# Altium PCB TIDA_010057.PcbDoc (part 2 of 9)
Units mil, origin at the board's own origin, x right, y up, seen from the top; angles counter-clockwise.
Board outline 1771.65 x 3543.31 mil, 12 copper layers (Top Layer, GND1, Signal Layer 1, GND2, POWER1, POWER2, GND4, POWER3, GND6, Signal Layer 2, GND7, Bottom Layer), stack 62.79 mil thick; 593 components, 374 nets, 1805 pads, 1029 vias.
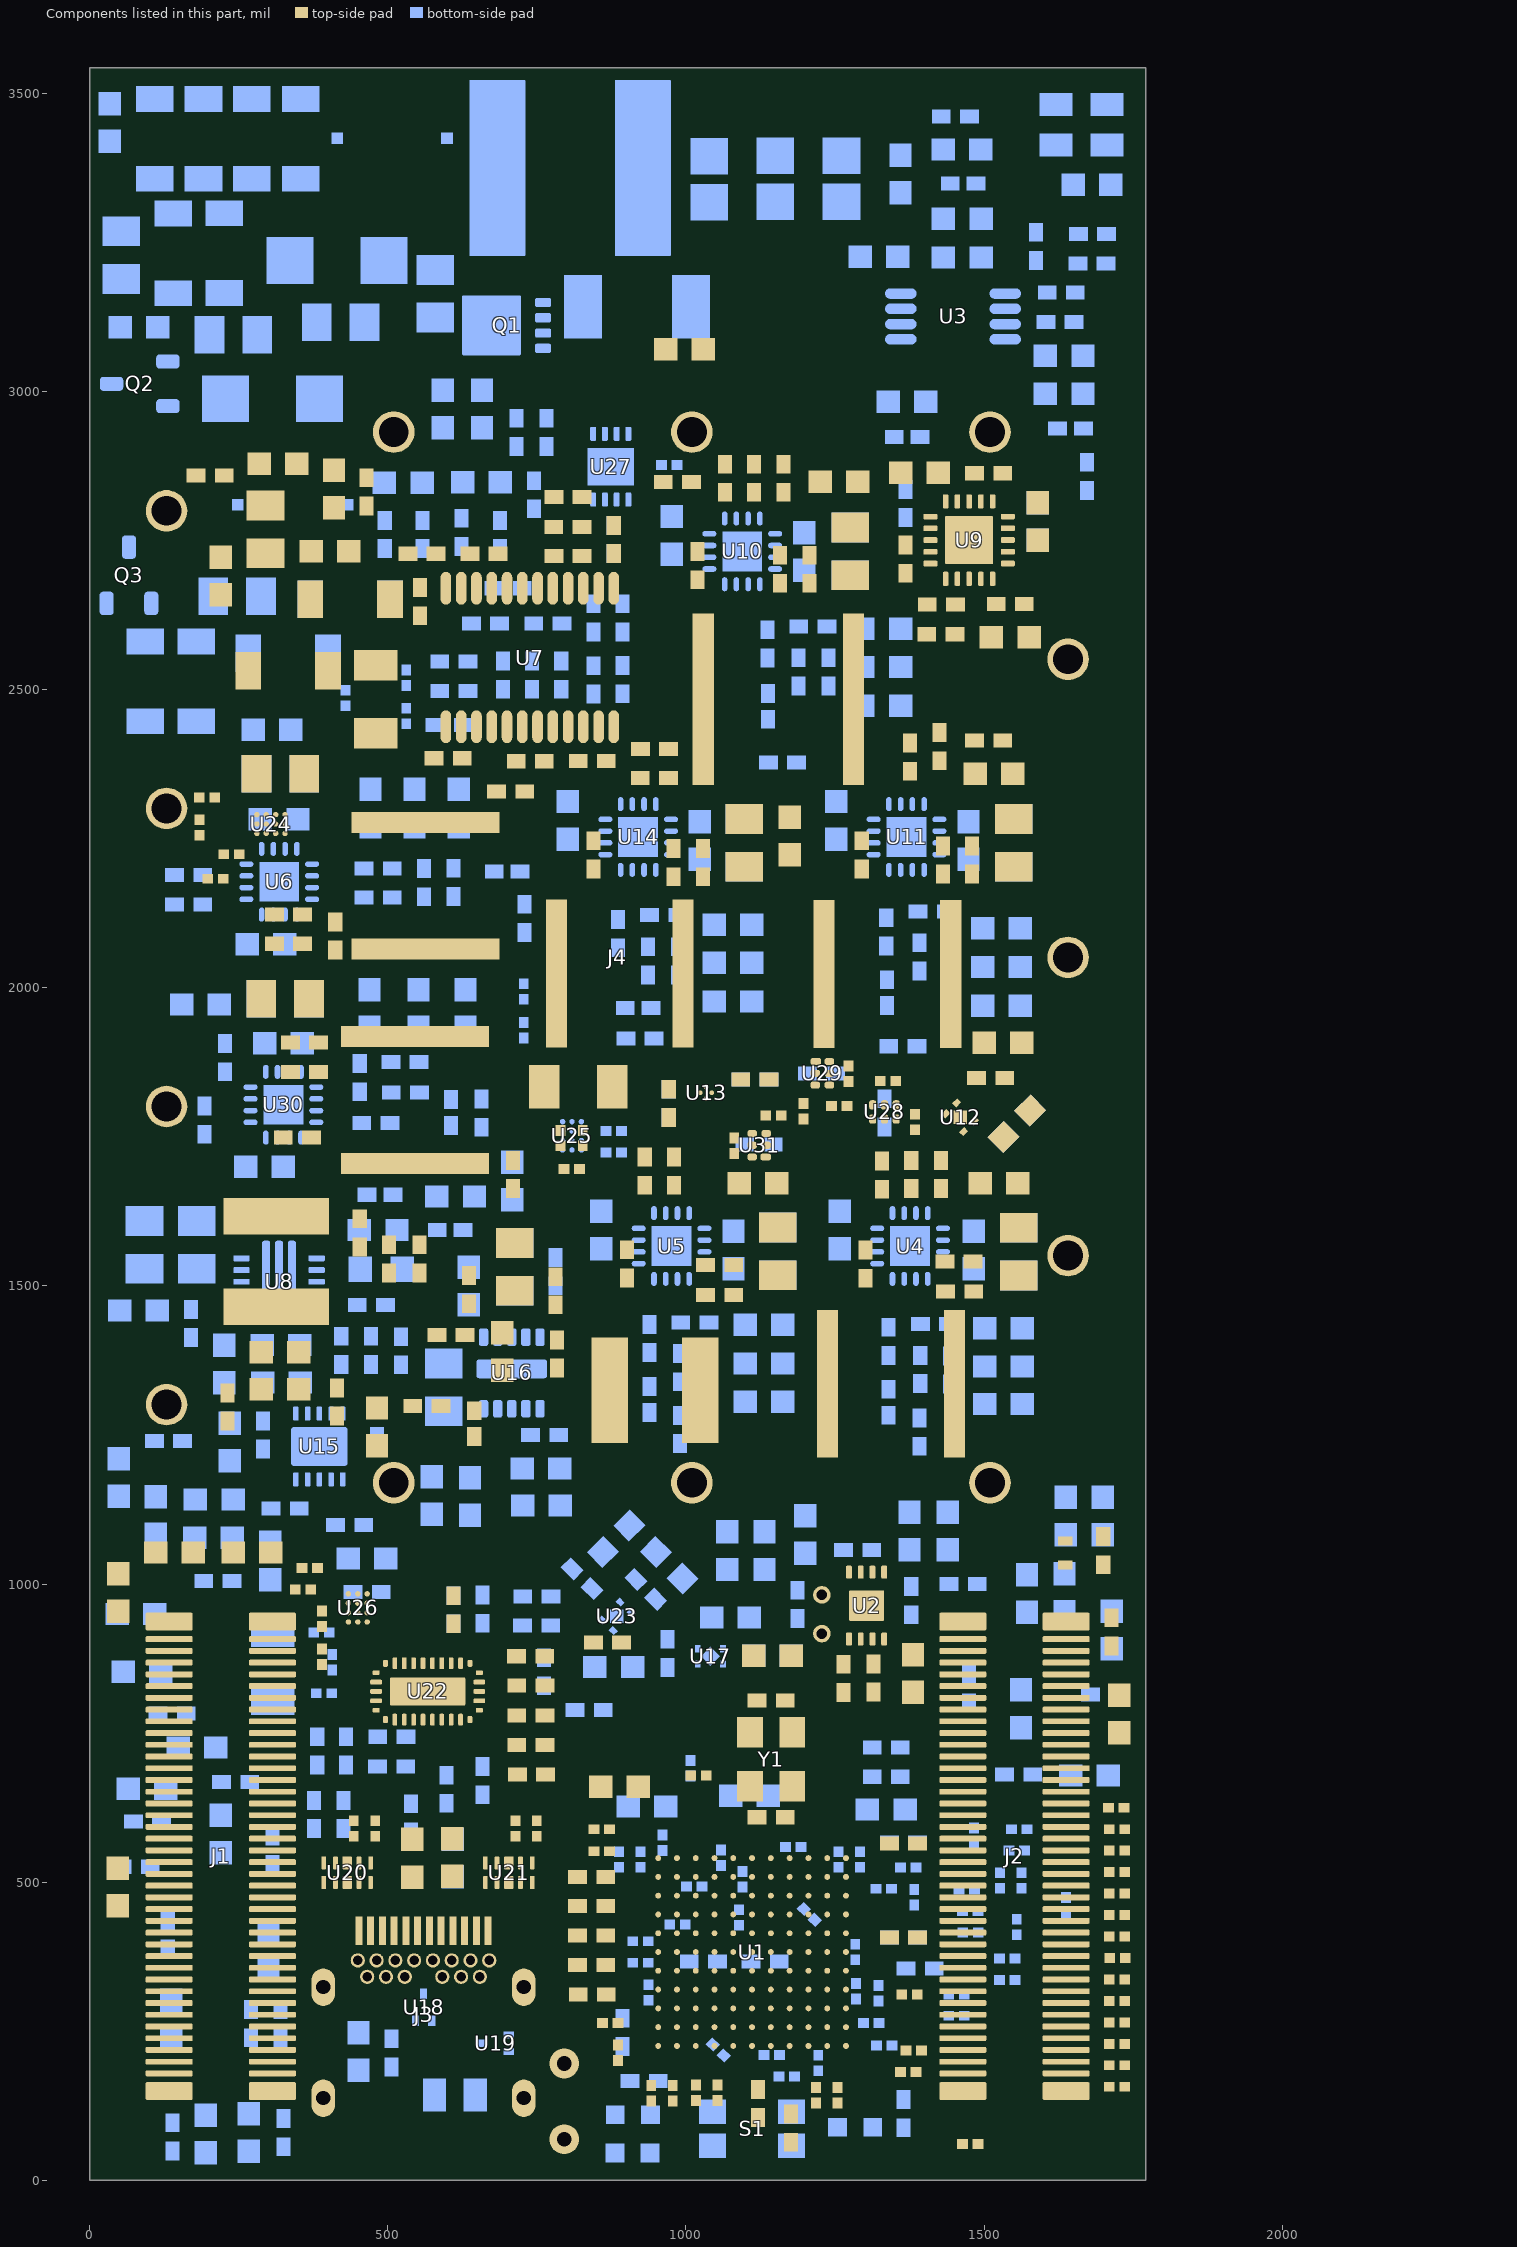
[diagram p12: the components of this part, seen from the top]

## Components (designator, comment, footprint, x,y, rotation, side; value= is the part's Value field where it differs from the comment) (continued)
R196 "RC0201JR-0722RL" 0201 1723,301 r0 top value=22
R197 "RC0201JR-0722RL" 0201 1723,337 r0 top value=22
R198 "RC0201JR-0722RL" 0201 1477.42,415.58 r180 bottom value=22
R199 "RC0201JR-0722RL" 0201 1722,625 r0 top value=22
R200 "RT0603BRD0710KL" 0603 83,3108 r0 bottom value=10.0k
R201 "RT0603BRD0710KL" 0603 220,2690.5 r90 top value=10.0k
R216 "RC0201JR-0722RL" 0201 1723,481 r180 top value=22
R217 "RC0201JR-0722RL" 0201 1637.65,461.65 r90 bottom value=22
R218 "RC0201JR-0722RL" 0201 1723,517 r180 top value=22
R219 "RC0201JR-0722RL" 0201 1723,553 r0 top value=22
R220 "RC0201JR-0722RL" 0201 1373,525 r0 bottom value=22
R221 "RC0201JR-0722RL" 0201 1723,589 r0 top value=22
R222 "RC0201JR-0722RL" 0201 1555,553 r180 bottom value=22
R223 "RC0201JR-0722RL" 0201 1527,503 r270 bottom value=22
R224 "RC0201JR-0722RL" 0201 1471,488 r180 bottom value=22
R225 "RC0201JR-0722RL" 0201 1559,589 r0 bottom value=22
R226 "RC0201JR-0722RL" 0201 1563,503 r90 bottom value=22
R227 "RC0201JR-0722RL" 0201 1723,445 r180 top value=22
R228 "RC0201JR-0722RL" 0201 1477,452 r0 bottom value=22
R229 "CRCW02014K70FKED" 0201_033 393,817 r180 bottom value=4.70k
R230 "CRCW02014K70FKED" 0201_033 389,919 r180 bottom value=4.70k
R231 "ERJ-1GN0R00C" 0201 390,942 r270 top value=0
R232 "RC0201FS-7D10KL" 0201 728,1928.99 r90 bottom value=10.0k
R233 "RC0201FS-7D10KL" 0201 728,1994 r90 bottom value=10.0k
R234 "ERJ-1GE0R00C" 0201 1273,1856 r90 top value=0
R235 "ERJ-1GN0R00C" 0201 237.99,2224 r180 top value=0
R236 "RC0201FS-7D10KL" 0201 369.01,1027 r180 top value=10.0k
R237 "RC0201FS-7D10KL" 0201 357.99,991 r180 top value=10.0k
R238 "ERJ-2RKF2003X" 0402 598.31,656 r90 bottom value=200k
R239 "ERA-3AEB2552V" 0603 757.5,1132 r180 bottom value=25.5k
R240 "RC0201JR-0722RL" 0201 1483,578 r90 bottom value=22
R241 "ERJ-3EKF1001V" 0603 636,1500 r270 bottom value=1.00k
R242 "ERJ-2GE0R00X" 0402 565.62,1299 r180 top value=0
R243 "RC0201JR-0722RL" 0201 1555,425 r270 bottom value=22
R244 "RC0201JR-0722RL" 0201 1723,409 r180 top value=22
R245 "ERJ-2GE0R00X" 0402 1452,3461 r180 bottom value=0
R246 "ERJ-2GE0R00X" 0402 132.38,1240 r180 bottom value=0
R247 "ERJ-2GE0R00X" 0402 784,1386 r270 top value=0
S1 "434153017835" SW_434153017835 1110.94,86.54 r0 bottom
SCL "TESTPOINT" TP_H045P075 1228,917 r90 top
SDA "TESTPOINT" TP_H045P075 1228,982 r90 top
U1 "CYUSB3014-BZXC" BZ-121 1111,383 r0 top locked
U2 "AT24C512C-MAHM" 8MA2 1303,964 r270 top
U3 "LM3488MMX/NOPB" DGK0008A_N 1448.01,3126 r180 bottom
U4 "TPS54218RTER" RTE0016F 1376,1567 r180 bottom locked
U5 "TPS54218RTER" RTE0016F 976,1567 r180 bottom
U6 "TPS54218RTER" RTE0016F 318,2178 r270 bottom
U7 "CDCE949PWR" PW0024A_N 738.38,2554 r270 top
U8 "TPS61178RNWR" RNW0013A 317.67,1507 r180 bottom
U9 "TPS74201RGRT" RGR0020A 1475,2751 r180 top
U10 "TPS54218RTER" RTE0016F 1094.5,2732 r180 bottom locked
U11 "TPS54218RTER" RTE0016F 1370,2253 r180 bottom
U12 "LP5907SNX-3.3/NOPB" DQN0004A 1460,1783 r135 top locked
U13 "LP5910-1.2YKAR" YKA0004ACAC 1033.74,1824 r45 top
U14 "TPS54218RTER" RTE0016F 920,2253 r180 bottom
U15 "TPS7A3901DSCR" DSC0010J 385.32,1230.88 r270 bottom locked
U16 "LMZM23601SILR" SIL0010A 708,1354.11 r270 bottom
U17 "LP5907SNX-1.8/NOPB" DQN0004A 1041,879 r180 bottom
U18 "TPD2EUSB30DRTR" DRT0003A 560,290 r90 bottom
U19 "TPD2EUSB30DRTR" DRT0003A 680,230 r180 bottom
U20 "TPD4E05U06DQAR" DQA0010A 432,516 r270 top
U21 "TPD4E05U06DQAR" DQA0010A 703,516 r270 top
U22 "HD3SS3220IRNHR" RNH0030A 567,820 r270 top locked
U23 "LP5907SNX-3.3/NOPB" DQN0004A 884,946 r225 bottom
U24 "INA231AIYFFR" YFF0012AKAD 304.13,2274.75 r90 top
U25 "INA231AIYFFR" YFF0012AKAD 809,1751.87 r180 bottom
U26 "INA231AIYFFR" YFF0012AKAD 449.75,960.13 r0 top
U27 "LMV112SD/NOPB" NGQ0008A 874,2874 r270 bottom
U28 "SN74LVC1G11DRYR" DRY0006A 1333,1791.81 r270 top
U29 "SN74LVC1G11DRYR" DRY0006A 1228.81,1856.69 r0 top
U30 "TPS54218RTER" RTE0016F 325,1804 r270 bottom
U31 "SN74LVC1G11DRYR" DRY0006A 1123,1736 r180 top
VBUS "TESTPOINT" TP_50MIL-25MILHOLE 796,69 r90 top locked
Y1 "ECS-192-18-33-JEM-TR" ECS_ECX-32 1143,706.5 r180 top
ZZ1 "This Assembly Note is for PCB labels only" AssemblyNoteLabel 265,5041 r0 top
ZZ2 "These assemblies are ESD sensitive, ESD precautions shall be observed." AssemblyNote 263,4963.11 r0 top
ZZ3 "These assemblies must be clean and free from flux and all contaminants. Use of no clean flux is not acceptable." AssemblyNote 263,4874.56 r0 top
ZZ4 "These assemblies must comply with workmanship standards IPC-A-610 Class 2, unless otherwise specified." AssemblyNote 263,4786 r0 top

## Footprints (in the part's own frame and the unit in brackets; to place one, negate y for a bottom-side part, rotate by r counter-clockwise, add the part's x,y. Pads: shape width x height; smd on the part's side, far side on the other; paste and mask are expansions set on the pad)
8MA2 [mm] "ATMEL DFN"
  rrect40% 0.55x0.25 smd: 1(-1.425,0.75) 2(-1.425,0.25) 3(-1.425,-0.25) 4(-1.425,-0.75) 5(1.425,-0.75) 6(1.425,-0.25) 7(1.425,0.25) 8(1.425,0.75)
  rrect8% 1.3x1.5 smd paste-1: 9(0,0)
  rrect8% 1.21x1.38 on Top Paste: 9(0,0)
  silkscreen extent -1.55,-1.15 0.75,1.15, body extent -1.55,-1.05 1.55,1.05, height 0.61
0201 [mm] "Data from Kemet datasheet CC101_COM dated 7/28/11"
  rect 0.46x0.42 smd mask+0.048: 1(-0.33,0) 2(0.33,0)
  body extent -0.31,-0.16 0.31,0.16, height 0.26
0201_033 [mm] "SMD, 2-Leads, Height 0.33mm"
  rect 0.46x0.42 smd mask+0.048: 1(-0.33,0) 2(0.33,0)
  body extent -0.31,-0.16 0.31,0.16, height 0.33
0402 [mm] "0402 from SM-752 data"
  rect 0.8x0.6 smd: 1(-0.6,0) 2(0.6,0)
  silkscreen extent -1.22,-0.52 1.22,0.52, body extent -0.55,-0.3 0.55,0.3, height 0.6
0402_065 [mm] "0402"
  rect 0.8x0.6 smd: 1(-0.6,0) 2(0.6,0)
  silkscreen extent -1.22,-0.52 1.22,0.52, body extent -0.55,-0.3 0.55,0.3, height 0.65
0402_070 [mil] "SMD, 2-Leads, Body 1.2x0.7mm, Height 0.7mm"
  rect 15x24 smd: 1(-20,0) 2(20,0)
  body extent -24,-14 24,14, height 28
0603 [mm] "0603 from SM-752 data"
  rect 1x0.95 smd: 1(-0.8,0) 2(0.8,0)
  silkscreen extent -1.52,-0.69 1.52,0.69, body extent -0.87,-0.47 0.87,0.47, height 1
0805_HV [mil] "0805 with 30mil clearance between pads"
  rect 50x63 smd: 1(-40,0) 2(40,0)
  silkscreen extent -74,-40 74,40, body extent -43,-29 43,29, height 57
0805M [mm] "0805 from SM-752 data"
  rect 1.55x1.6 smd: 1(-0.975,0) 2(0.975,0)
  silkscreen extent -2.07,-1.12 2.07,1.12, body extent -1.1,-0.72 1.1,0.72, height 1.45
1206 [mm] "1206 from SM-752 data"
  rect 1.3x1.85 smd: 1(-1.45,0) 2(1.45,0)
  silkscreen extent -2.4,-1.21 2.4,1.21, body extent -1.7,-0.9 1.7,0.9, height 1.35
1206_180 [mm] "1206_180"
  rect 1.1x1.6 smd: 1(-1.7,0) 2(1.7,0)
  silkscreen extent -0.9,-1 0.9,1, body extent -1.75,-0.95 1.75,0.95, height 1.8
2010 [mm] "Chip Capacitor, Body 5.08x2.54mm, IPC Medium Density"
  rect 1.6x2.7 smd: 1(-2.3,0) 2(2.3,0)
  silkscreen extent -3.42,-1.65 3.42,1.65, body extent -2.73,-1.45 2.73,1.45, height 1.66
5106 [mm] "Keystone"
  rect 0.99x1.4 smd: 1(-0.85,0) 2(0.88,0)
  silkscreen extent -1.63,-0.97 1.65,0.97, body extent -1.06,-0.69 1.06,0.69, height 0.84
AssemblyNote [mil] "Assembly Note"
AssemblyNoteLabel [mil] "Assembly Note for PCB Labels"
BZ-121 [mm] "BGA, 121-Leads, Body 10x10mm, Pitch 0.8mm"
  round 0.25 smd: A1(-4,4) A2(-3.2,4) A3(-2.4,4) A4(-1.6,4) A5(-0.8,4) A6(0,4) A7(0.8,4) A8(1.6,4) A9(2.4,4) A10(3.2,4) A11(4,4) B1(-4,3.2) B2(-3.2,3.2) B3(-2.4,3.2) B4(-1.6,3.2) B5(-0.8,3.2) B6(0,3.2) B7(0.8,3.2) B8(1.6,3.2) B9(2.4,3.2) B10(3.2,3.2) B11(4,3.2) C1(-4,2.4) C2(-3.2,2.4) C3(-2.4,2.4) C4(-1.6,2.4) C5(-0.8,2.4) C6(0,2.4) C7(0.8,2.4) C8(1.6,2.4) C9(2.4,2.4) C10(3.2,2.4) C11(4,2.4) D1(-4,1.6) D2(-3.2,1.6) D3(-2.4,1.6) D4(-1.6,1.6) D5(-0.8,1.6) D6(0,1.6) D7(0.8,1.6) D8(1.6,1.6) D9(2.4,1.6) D10(3.2,1.6) D11(4,1.6) E1(-4,0.8) E2(-3.2,0.8) E3(-2.4,0.8) E4(-1.6,0.8) E5(-0.8,0.8) E6(0,0.8) E7(0.8,0.8) E8(1.6,0.8) E9(2.4,0.8) E10(3.2,0.8) E11(4,0.8) F1(-4,0) F2(-3.2,0) F3(-2.4,0) F4(-1.6,0) F5(-0.8,0) F6(0,0) F7(0.8,0) F8(1.6,0) F9(2.4,0) F10(3.2,0) F11(4,0) G1(-4,-0.8) G2(-3.2,-0.8) G3(-2.4,-0.8) G4(-1.6,-0.8) G5(-0.8,-0.8) G6(0,-0.8) G7(0.8,-0.8) G8(1.6,-0.8) G9(2.4,-0.8) G10(3.2,-0.8) G11(4,-0.8) H1(-4,-1.6) H2(-3.2,-1.6) H3(-2.4,-1.6) H4(-1.6,-1.6) H5(-0.8,-1.6) H6(0,-1.6) H7(0.8,-1.6) H8(1.6,-1.6) H9(2.4,-1.6) H10(3.2,-1.6) H11(4,-1.6) J1(-4,-2.4) J2(-3.2,-2.4) J3(-2.4,-2.4) J4(-1.6,-2.4) J5(-0.8,-2.4) J6(0,-2.4) J7(0.8,-2.4) J8(1.6,-2.4) J9(2.4,-2.4) J10(3.2,-2.4) J11(4,-2.4) K1(-4,-3.2) K2(-3.2,-3.2) K3(-2.4,-3.2) K4(-1.6,-3.2) K5(-0.8,-3.2) K6(0,-3.2) K7(0.8,-3.2) K8(1.6,-3.2) K9(2.4,-3.2) K10(3.2,-3.2) K11(4,-3.2) L1(-4,-4) L2(-3.2,-4) L3(-2.4,-4) L4(-1.6,-4) L5(-0.8,-4) L6(0,-4) L7(0.8,-4) L8(1.6,-4) L9(2.4,-4) L10(3.2,-4) L11(4,-4)
  silkscreen extent -5,-5 5,5, body extent -5,-5 5,5, height 1.7
CE_Mark_5mm [mil] "Minimum text height for CE Mark"
  silkscreen extent -138,-98 138,98
CPF0603 [mm] "TE Connectivity"
  rect 1x1.1 smd: 1(-0.9,0) 2(0.9,0)
  silkscreen extent -1.65,-0.8 1.65,0.8, body extent -0.82,-0.45 0.82,0.45, height 0.55
DGK0008A_N [mm] "TSOP, 8-Leads, Body 3x3mm, Pitch 0.65mm, IPC Medium Density"
  oval 1.35x0.45 smd: 1(-2.225,0.975) 2(-2.225,0.325) 3(-2.225,-0.325) 4(-2.225,-0.975) 5(2.225,-0.975) 6(2.225,-0.325) 7(2.225,0.325) 8(2.225,0.975)
  silkscreen extent -2.75,-1.55 0.95,1.55, body extent -2.45,-1.5 2.45,1.5, height 0.96
DNH0008A [mm] "VSONP-8"
  rrect50% 0.7x0.4 smd paste-0.05 mask-0.05: 1(-1.55,0.975) 2(-1.55,0.325) 3(-1.55,-0.325) 4(-1.55,-0.975) 5(1.55,-0.975) 6(1.55,-0.325) 7(1.55,0.325) 8(1.55,0.975)
  rrect4% 2.51x2.55 smd paste-1.5 mask-1.5: 9(0.645,0)
  rrect14% 0.705x1.125 on Bottom Paste: 9A(-0.208,0.662) 9B(0.697,0.662) 9C(-0.208,-0.663) 9D(0.697,-0.663)
  silkscreen extent -1.62,-1.7 1.62,1.7, body extent -1.65,-1.66 1.65,1.66, height 0.91
DQA0010A [mm] "SON, 10-Leads, Body 1x2.5mm, Pitch 0.5mm, TI Recommended"
  rrect50% 0.565x0.2 smd: 1(-0.417,1) 2(-0.417,0.5) 4(-0.417,-0.5) 5(-0.417,-1) 6(0.417,-1) 7(0.417,-0.5) 9(0.417,0.5) 10(0.417,1)
  rrect28% 0.565x0.36 on Top Paste: 3(-0.417,0) 8(0.417,0)
  rrect25% 0.565x0.4 smd paste-0.2: 3(-0.417,0) 8(0.417,0)
  silkscreen extent -0.67,-1.45 0.55,1.45, body extent -0.55,-1.3 0.55,1.3, height 0.56
DQN0004A [mm] "SON, 0.65mm pitch"
  rect 0.25x0.31 smd paste-1 mask-0.31: 1(-0.535,0.325) 2(-0.535,-0.325) 3(0.535,-0.325) 4(0.535,0.325)
  rect 0.58x0.58 smd rot 45 paste-0.065 mask-0.05: 5(0,0)
  Top Layer region: -0.66,-0.48 -0.2,-0.48 -0.2,-0.379 -0.409,-0.17 -0.66,-0.17
  Top Layer region: 0.66,-0.48 0.2,-0.48 0.2,-0.379 0.409,-0.17 0.66,-0.17
  Top Layer region: 0.66,0.48 0.2,0.48 0.2,0.379 0.409,0.17 0.66,0.17
  Top Layer region: -0.66,0.48 -0.2,0.48 -0.2,0.379 -0.409,0.17 -0.66,0.17
  silkscreen extent -0.88,-0.7 0.88,0.7, body extent -0.53,-0.53 0.53,0.53, height 0.42
DRT0003A [mm] "SOTFL, 3-Leads, Body 1x1mm (inc leads), Pitch 0.35mm"
  rect 0.45x0.3 smd: 1(-0.575,0.35) 2(-0.575,-0.35) 3(0.575,0)
  silkscreen extent -0.03,-0.6 0.5,0.6, body extent -0.5,-0.5 0.5,0.5, height 0.5
DRY0006A [mm] "USON-6"
  rrect67% 0.45x0.3 smd paste-0.05 mask-0.05: 1(-0.275,0.5)
  rrect67% 0.4x0.3 smd paste-0.05 mask-0.05: 2(-0.3,0) 3(-0.3,-0.5) 4(0.3,-0.5) 5(0.3,0) 6(0.3,0.5)
  body extent -0.5,-0.72 0.5,0.73, height 0.58
DSC0010J [mm] "WSON-10"
  rrect42% 0.6x0.24 smd: 1(-1.4,1) 2(-1.4,0.5) 3(-1.4,0) 4(-1.4,-0.5) 5(-1.4,-1) 6(1.4,-1) 7(1.4,-0.5) 8(1.4,0) 9(1.4,0.5) 10(1.4,1)
  rrect12% 1.65x2.4 smd paste-1 mask-2: 11(0,0)
  Top Layer region: -0.375,-1.65 -0.375,-1.2 -0.775,-1.2 -0.794,-1.196 -0.81,-1.185 -0.821,-1.169 -0.825,-1.15 -0.825,-1.15 -0.825,1.15 -0.821,1.169 -0.81,1.185 -0.794,1.196 -0.775,1.2 -0.775,1.2 -0.375,1.2 -0.375,1.65 -0.371,1.669 -0.36,1.685 -0.344,1.696 -0.325,1.7 -0.325,1.7 -0.325,1.7 -0.175,1.7 -0.175,1.7 -0.156,1.696 -0.14,1.685 -0.129,1.669 -0.125,1.65 -0.125,1.65 -0.125,1.2 0.125,1.2 0.125,1.65 0.129,1.669 0.14,1.685 0.156,1.696 0.175,1.7 0.175,1.7 0.175,1.7 0.325,1.7 0.325,1.7 0.344,1.696 0.36,1.685 0.371,1.669 0.375,1.65 0.375,1.65 0.375,1.2 0.775,1.2 0.794,1.196 0.81,1.185 0.821,1.169 0.825,1.15 0.825,1.15 0.825,-1.15 0.821,-1.169 0.81,-1.185 0.794,-1.196 0.775,-1.2 0.775,-1.2 0.375,-1.2 0.375,-1.65 0.371,-1.669 0.36,-1.685 0.344,-1.696 0.325,-1.7 0.325,-1.7 0.175,-1.7 0.156,-1.696 0.14,-1.685 0.129,-1.669 0.125,-1.65 0.125,-1.65 0.125,-1.2 -0.125,-1.2 -0.125,-1.65 -0.129,-1.669 -0.14,-1.685 -0.156,-1.696 -0.175,-1.7 -0.175,-1.7 -0.325,-1.7 -0.344,-1.696 -0.36,-1.685 -0.371,-1.669 -0.375,-1.65
  body extent -1.5,-1.5 1.5,1.5, height 0.8
ECS_ECX-32 [mm] "SMD, 4-Leads, Body 3.2x2.5mm"
  rect 1.1x1.3 smd: 1(-0.9,1.15) 2(-0.9,-1.15) 3(0.9,-1.15) 4(0.9,1.15)
  silkscreen extent -1.81,-0.2 1.3,1.21, body extent -1.25,-1.6 1.25,1.6, height 0.81
ESD_Overlay_Small [mil]
  silkscreen extent -62,-48 64,61
FCC_disclaimer [mil]
HSMx-C190_Amber [mm] "SMD, 2-Leads, Body 1.6x0.8mm"
  rect 0.8x0.8 smd: 1(-0.75,0) 2(0.75,0)
  silkscreen extent -1.2,-0.8 1.85,0.8, body extent -0.85,-0.45 0.85,0.45, height 0.9
IEC_HighVoltage_Small [mil]
  silkscreen extent -107,-88 107,97
NGQ0008A [mm] "SON, 8-Leads, Body 3x3mm, Pitch 0.5mm"
  rrect40% 0.6x0.25 smd: 1(-1.4,0.75) 2(-1.4,0.25) 3(-1.4,-0.25) 4(-1.4,-0.75) 5(1.4,-0.75) 6(1.4,-0.25) 7(1.4,0.25) 8(1.4,0.75)
  rrect6% 1.6x2 smd paste-0.8: 9(0,0)
  silkscreen extent -1.65,-1.65 1.65,1.65, body extent -1.5,-1.5 1.5,1.5, height 0.77
Panasonic_AXK5S80347Y [mm] "Receptacle, 0.5mm, 40x2, SMD"
  rrect13% 0.75x2 smd paste-2: 1(-10,2.2) 2(-10,-2.2) 79(10,2.2) 80(10,-2.2)
  rrect40% 0.25x2 smd paste-2: 3(-9.25,2.2) 4(-9.25,-2.2) 5(-8.75,2.2) 6(-8.75,-2.2) 7(-8.25,2.2) 8(-8.25,-2.2) 9(-7.75,2.2) 10(-7.75,-2.2) 11(-7.25,2.2) 12(-7.25,-2.2) 13(-6.75,2.2) 14(-6.75,-2.2) 15(-6.25,2.2) 16(-6.25,-2.2) 17(-5.75,2.2) 18(-5.75,-2.2) 19(-5.25,2.2) 20(-5.25,-2.2) 21(-4.75,2.2) 22(-4.75,-2.2) 23(-4.25,2.2) 24(-4.25,-2.2) 25(-3.75,2.2) 26(-3.75,-2.2) 27(-3.25,2.2) 28(-3.25,-2.2) 29(-2.75,2.2) 30(-2.75,-2.2) 31(-2.25,2.2) 32(-2.25,-2.2) 33(-1.75,2.2) 34(-1.75,-2.2) 35(-1.25,2.2) 36(-1.25,-2.2) 37(-0.75,2.2) 38(-0.75,-2.2) 39(-0.25,2.2) 40(-0.25,-2.2) 41(0.25,2.2) 42(0.25,-2.2) 43(0.75,2.2) 44(0.75,-2.2) 45(1.25,2.2) 46(1.25,-2.2) 47(1.75,2.2) 48(1.75,-2.2) 49(2.25,2.2) 50(2.25,-2.2) 51(2.75,2.2) 52(2.75,-2.2) 53(3.25,2.2) 54(3.25,-2.2) 55(3.75,2.2) 56(3.75,-2.2) 57(4.25,2.2) 58(4.25,-2.2) 59(4.75,2.2) 60(4.75,-2.2) 61(5.25,2.2) 62(5.25,-2.2) 63(5.75,2.2) 64(5.75,-2.2) 65(6.25,2.2) 66(6.25,-2.2) 67(6.75,2.2) 68(6.75,-2.2) 69(7.25,2.2) 70(7.25,-2.2) 71(7.75,2.2) 72(7.75,-2.2) 73(8.25,2.2) 74(8.25,-2.2) 75(8.75,2.2) 76(8.75,-2.2) 77(9.25,2.2) 78(9.25,-2.2)
  body extent -11.6,-2.7 11.6,2.7, height 6.05
Pb-Free_Overlay_Small [mil]
  silkscreen extent -46,-46 46,46
PW0024A_N [mm] "TSOP, 24-Leads, Body 7.8x4.4mm, Pitch 0.65mm, IPC Medium Density"
  oval 1.4x0.45 smd: 1(-2.95,3.575) 2(-2.95,2.925) 3(-2.95,2.275) 4(-2.95,1.625) 5(-2.95,0.975) 6(-2.95,0.325) 7(-2.95,-0.325) 8(-2.95,-0.975) 9(-2.95,-1.625) 10(-2.95,-2.275) 11(-2.95,-2.925) 12(-2.95,-3.575) 13(2.95,-3.575) 14(2.95,-2.925) 15(2.95,-2.275) 16(2.95,-1.625) 17(2.95,-0.975) 18(2.95,-0.325) 19(2.95,0.325) 20(2.95,0.975) 21(2.95,1.625) 22(2.95,2.275) 23(2.95,2.925) 24(2.95,3.575)
  silkscreen extent -3.51,-3.95 1.6,4.04, body extent -3.21,-3.9 3.21,3.9, height 1
RGR0020A [mm] "QFN, 20-Leads, Body 3.5x3.5mm, Pitch 0.5mm, Thermal Pad 2.05x2.05mm, TI Recommended"
  rrect42% 0.6x0.24 smd: 1(-1.65,1) 2(-1.65,0.5) 3(-1.65,0) 4(-1.65,-0.5) 5(-1.65,-1) 11(1.65,-1) 12(1.65,-0.5) 13(1.65,0) 14(1.65,0.5) 15(1.65,1)
  rrect42% 0.24x0.6 smd: 6(-1,-1.65) 7(-0.5,-1.65) 8(0,-1.65) 9(0.5,-1.65) 10(1,-1.65) 16(1,1.65) 17(0.5,1.65) 18(0,1.65) 19(-0.5,1.65) 20(-1,1.65)
  rrect5% 2.05x2.05 smd paste-1.025: 21(0,0)
  silkscreen extent -1.97,-1.97 1.97,1.97, body extent -1.75,-1.75 1.75,1.75, height 1
RNH0030A [mm] "QFN, 30-Leads, Body 4.5x2.5mm, Pitch 0.4mm, Thermal Pad 3.2x1.2mm"
  rrect50% 0.3x0.2 smd mask+0.076: 1(-1.2,1.8) 10(-1.2,-1.8) 16(1.2,-1.8) 25(1.2,1.8)
  rrect50% 0.5x0.2 smd mask+0.05: 2(-1.2,1.4) 3(-1.2,1) 4(-1.2,0.6) 5(-1.2,0.2) 6(-1.2,-0.2) 7(-1.2,-0.6) 8(-1.2,-1) 9(-1.2,-1.4) 17(1.2,-1.4) 18(1.2,-1) 19(1.2,-0.6) 20(1.2,-0.2) 21(1.2,0.2) 22(1.2,0.6) 23(1.2,1) 24(1.2,1.4)
  rrect50% 0.2x0.3 smd mask+0.076: 11(-0.8,-2.2) 15(0.8,-2.2) 26(0.8,2.2) 30(-0.8,2.2)
  rrect50% 0.2x0.5 smd mask+0.05: 12(-0.4,-2.2) 13(0,-2.2) 14(0.4,-2.2) 27(0.4,2.2) 28(0,2.2) 29(-0.4,2.2)
  rrect8% 1.2x3.2 smd paste-1.2 mask+0.05: 31(0,0)
  rrect9% 1.13x1.39 on Top Paste: ""(0,0.795) ""(0,-0.795)
  Top Layer region: 0.7,2.4 0.704,2.419 0.715,2.435 0.731,2.446 0.75,2.45 0.75,2.45 0.85,2.45 0.869,2.446 0.885,2.435 0.896,2.419 0.9,2.4 0.9,2.4 0.9,2.062 0.896,2.043 0.885,2.027 0.885,2.027 0.823,1.965 0.823,1.965 0.807,1.954 0.788,1.95 0.788,1.95 0.75,1.95 0.731,1.954 0.715,1.965 0.704,1.981 0.7,2 0.7,2 0.7,2
  Top Layer region: 0.965,1.823 0.954,1.807 0.95,1.788 0.95,1.788 0.95,1.75 0.954,1.731 0.965,1.715 0.981,1.704 1,1.7 1,1.7 1.4,1.7 1.419,1.704 1.435,1.715 1.446,1.731 1.45,1.75 1.45,1.75 1.45,1.85 1.446,1.869 1.435,1.885 1.419,1.896 1.4,1.9 1.4,1.9 1.062,1.9 1.043,1.896 1.027,1.885 1.027,1.885
  Top Layer region: -0.7,2.4 -0.704,2.419 -0.715,2.435 -0.731,2.446 -0.75,2.45 -0.75,2.45 -0.85,2.45 -0.869,2.446 -0.885,2.435 -0.896,2.419 -0.9,2.4 -0.9,2.4 -0.9,2.062 -0.896,2.043 -0.885,2.027 -0.885,2.027 -0.823,1.965 -0.823,1.965 -0.807,1.954 -0.788,1.95 -0.788,1.95 -0.75,1.95 -0.731,1.954 -0.715,1.965 -0.704,1.981 -0.7,2 -0.7,2 -0.7,2
  Top Layer region: -0.965,1.823 -0.954,1.807 -0.95,1.788 -0.95,1.788 -0.95,1.75 -0.954,1.731 -0.965,1.715 -0.981,1.704 -1,1.7 -1,1.7 -1.4,1.7 -1.419,1.704 -1.435,1.715 -1.446,1.731 -1.45,1.75 -1.45,1.75 -1.45,1.85 -1.446,1.869 -1.435,1.885 -1.419,1.896 -1.4,1.9 -1.4,1.9 -1.062,1.9 -1.043,1.896 -1.027,1.885 -1.027,1.885
  Top Layer region: -0.7,-2.4 -0.704,-2.419 -0.715,-2.435 -0.731,-2.446 -0.75,-2.45 -0.75,-2.45 -0.85,-2.45 -0.869,-2.446 -0.885,-2.435 -0.896,-2.419 -0.9,-2.4 -0.9,-2.4 -0.9,-2.062 -0.896,-2.043 -0.885,-2.027 -0.885,-2.027 -0.823,-1.965 -0.823,-1.965 -0.807,-1.954 -0.788,-1.95 -0.788,-1.95 -0.75,-1.95 -0.731,-1.954 -0.715,-1.965 -0.704,-1.981 -0.7,-2 -0.7,-2 -0.7,-2
  Top Layer region: -0.965,-1.823 -0.954,-1.807 -0.95,-1.788 -0.95,-1.788 -0.95,-1.75 -0.954,-1.731 -0.965,-1.715 -0.981,-1.704 -1,-1.7 -1,-1.7 -1.4,-1.7 -1.419,-1.704 -1.435,-1.715 -1.446,-1.731 -1.45,-1.75 -1.45,-1.75 -1.45,-1.85 -1.446,-1.869 -1.435,-1.885 -1.419,-1.896 -1.4,-1.9 -1.4,-1.9 -1.062,-1.9 -1.043,-1.896 -1.027,-1.885 -1.027,-1.885
  Top Layer region: 0.965,-1.823 0.954,-1.807 0.95,-1.788 0.95,-1.788 0.95,-1.75 0.954,-1.731 0.965,-1.715 0.981,-1.704 1,-1.7 1,-1.7 1.4,-1.7 1.419,-1.704 1.435,-1.715 1.446,-1.731 1.45,-1.75 1.45,-1.75 1.45,-1.85 1.446,-1.869 1.435,-1.885 1.419,-1.896 1.4,-1.9 1.4,-1.9 1.062,-1.9 1.043,-1.896 1.027,-1.885 1.027,-1.885
  Top Layer region: 0.7,-2.4 0.704,-2.419 0.715,-2.435 0.731,-2.446 0.75,-2.45 0.75,-2.45 0.85,-2.45 0.869,-2.446 0.885,-2.435 0.896,-2.419 0.9,-2.4 0.9,-2.4 0.9,-2.062 0.896,-2.043 0.885,-2.027 0.885,-2.027 0.823,-1.965 0.823,-1.965 0.807,-1.954 0.788,-1.95 0.788,-1.95 0.75,-1.95 0.731,-1.954 0.715,-1.965 0.704,-1.981 0.7,-2 0.7,-2 0.7,-2
  silkscreen extent -1.5,-2.5 1.5,2.5, body extent -1.25,-2.25 1.25,2.25, height 0.77
RNW0013A [mm] "SMD, 13-Leads, Body 3x3.5mm, Pitch 0.5mm"
  rrect40% 0.7x0.25 smd: 1(-1.6,1) 2(-1.6,0.5) 3(-1.6,0) 4(-1.6,-0.5) 5(-1.6,-1) 9(1.6,-1) 10(1.6,-0.5) 11(1.6,0) 12(1.6,0.5) 13(1.6,1)
  rrect40% 0.25x1 on Bottom Paste: 6(-0.55,-1.2) 6(-0.55,0) 6(-0.55,1.2) 7(0,-1.2) 7(0,0) 7(0,1.2) 8(0.55,-1.2) 8(0.55,0) 8(0.55,1.2)
  rrect57% 0.35x3.5 smd paste-0.5 mask-0.05: 6(-0.55,0) 7(0,0) 8(0.55,0)
  silkscreen extent -1.9,-1.65 1.9,1.65, body extent -1.78,-1.53 1.78,1.53, height 1.01
RTE0016F [mm] "Texas Insturments"
  oval 0.6x0.24 smd paste+0: 1(-1.4,0.75) 2(-1.4,0.25) 3(-1.4,-0.25) 4(-1.4,-0.75) 9(1.4,-0.75) 10(1.4,-0.25) 11(1.4,0.25) 12(1.4,0.75)
  oval 0.24x0.6 smd paste+0: 5(-0.75,-1.4) 6(-0.25,-1.4) 7(0.25,-1.4) 8(0.75,-1.4) 13(0.75,1.4) 14(0.25,1.4) 15(-0.25,1.4) 16(-0.75,1.4)
  rect 1.7x1.7 smd paste-1: 17(0,0)
  silkscreen extent -1.73,-1.73 1.73,1.73, body extent -1.58,-1.58 1.58,1.58, height 0.81
SHIELD_CBS1P50X1P75 [mm]
  round 1.77 hole 1.27: SH1(-19.05,19.202) SH2(-6.35,19.202) SH3(6.35,19.202) SH4(19.025,19.202) SH5(-22.377,9.525) SH6(-22.377,-3.175) SH7(-22.377,-15.875) SH8(-12.7,-19.202) SH9(0,-19.202) SH10(12.7,-19.202) SH11(22.377,-15.875) SH12(22.377,-3.175) SH13(22.377,9.525)
  Top Layer region: -24.288,13.208 -21.937,13.208 -21.937,18.542 -24.288,18.542
  Top Layer region: -24.288,0.508 -21.937,0.508 -21.937,5.842 -24.288,5.842
  Top Layer region: -24.288,-12.192 -21.937,-12.192 -21.937,-6.858 -24.288,-6.858
  Top Layer region: -16.383,-21.112 -16.383,-18.761 -21.717,-18.761 -21.717,-21.112
  Top Layer region: -3.683,-21.112 -3.683,-18.761 -9.017,-18.761 -9.017,-21.112
  Top Layer region: 9.017,-21.112 9.017,-18.761 3.683,-18.761 3.683,-21.112
  Top Layer region: 21.717,-21.112 21.717,-18.761 16.383,-18.761 16.383,-21.112
  Top Layer region: 21.936,13.208 24.287,13.208 24.287,18.542 21.936,18.542
  Top Layer region: 21.936,0.508 24.287,0.508 24.287,5.842 21.936,5.842
  Top Layer region: 21.936,-12.192 24.287,-12.192 24.287,-6.858 21.936,-6.858
  Top Layer region: -10.033,18.761 -10.033,21.112 -15.367,21.112 -15.367,18.761
  Top Layer region: 2.667,18.761 2.667,21.112 -2.667,21.112 -2.667,18.761
  Top Layer region: 15.367,18.761 15.367,21.112 10.033,21.112 10.033,18.761
  Top Layer region: -22.918,6.858 -21.837,6.858 -21.837,12.192 -22.918,12.192
  Top Layer region: -22.918,-5.842 -21.837,-5.842 -21.837,-0.508 -22.918,-0.508
  Top Layer region: -22.918,-18.542 -21.837,-18.542 -21.837,-13.208 -22.918,-13.208
  Top Layer region: -10.033,-19.842 -10.033,-18.761 -15.367,-18.761 -15.367,-19.842
  Top Layer region: 2.667,-19.842 2.667,-18.761 -2.667,-18.761 -2.667,-19.842
  Top Layer region: 15.367,-19.842 15.367,-18.761 10.033,-18.761 10.033,-19.842
  Top Layer region: 21.936,-18.542 23.017,-18.542 23.017,-13.208 21.936,-13.208
  Top Layer region: 21.936,-5.842 23.017,-5.842 23.017,-0.508 21.936,-0.508
  Top Layer region: 21.936,6.858 23.017,6.858 23.017,12.192 21.936,12.192
  Top Layer region: 21.717,18.661 21.717,19.742 16.383,19.742 16.383,18.661
  Top Layer region: 9.017,18.661 9.017,19.742 3.683,19.742 3.683,18.661
  Top Layer region: -3.683,18.661 -3.683,19.742 -9.017,19.742 -9.017,18.661
  Top Layer region: -16.383,18.661 -16.383,19.742 -21.717,19.742 -21.717,18.661
  silkscreen extent -23.84,-20.68 23.84,20.66, body extent -23.84,-20.66 23.84,20.66, height 5.17
SIL0010A [mm] "MicoSiP, TI recommended land pattern"
  rrect50% 0.75x0.4 smd paste-0.05 mask-0.05: 1(-1.525,1.2) 2(-1.525,0.6) 3(-1.525,0) 4(-1.525,-0.6) 5(-1.525,-1.2) 6(1.525,-1.2) 7(1.525,-0.6) 8(1.525,0) 9(1.525,0.6) 10(1.525,1.2)
  rrect14% 0.7x0.833 on Bottom Paste: 11(-0.175,-1.03) 11(-0.175,0) 11(-0.175,1.03)
  rrect25% 0.8x3 smd paste-0.5 mask-0.05: 11(-0.175,0)
  silkscreen extent -1.9,-1.68 1.9,1.68, body extent -1.9,-1.5 1.9,1.5, height 1.49
SMA [mm] "Molded Diode, 2-Leads, Body 4.3x2.6mm, IPC Medium Density, based on OnSemi component dimensions and land pattern"
  rect 2x2 smd: 1(-2,0) 2(2,0)
  silkscreen extent -3.66,-1.57 2.79,1.57, body extent -2.6,-1.3 2.6,1.3, height 2.42
SOD-523 [mm] "NXP Semiconductor recommended land pattern, nominal STEP model"
  rect 0.8x0.6 smd paste-0.05: 1(-0.55,0) 2(0.55,0)
  silkscreen extent -1.65,-0.66 1.2,0.66, body extent -0.8,-0.4 0.8,0.4, height 0.72
SOT-23 [mm] "SOT23, 3-Leads, Body 2.9x1.3mm, Pitch 0.95mm, Lead Span 2.5mm, IPC Medium Density"
  rrect50% 1x0.6 smd: 1(-1.2,0.95) 2(-1.2,-0.95) 3(1.2,0)
  silkscreen extent -1.62,-1.5 0.7,1.5, body extent -1.16,-1.45 1.21,1.45, height 1
SW_434153017835 [mm] "SMD, 4-Leads, Body 3.5x2.9mm"
  rect 1.15x1.05 smd: 1(-1.675,0.725) 2(-1.675,-0.725) 3(1.675,0.725) 4(1.675,-0.725)
  silkscreen extent -0.7,-1.4 0.7,1.6, body extent -2.15,-1.45 2.15,1.45, height 1.7
TI_Stacked_Overlay_Small [mil]
  silkscreen extent -418,-98 418,98
TP_50MIL-25MILHOLE [mil]
  round 50 hole 25: 1(0,0)
TP_H045P075 [mm] "TP_H0.45P0.75"
  round 0.75 hole 0.45: 1(0,0)
WE-LQS_5040 [mm] "SMD Power Inductor, 2-Leads, body 5x5mm"
  rect 1.55x4.5 smd: 1(-1.925,0) 2(1.925,0)
  silkscreen extent -2.6,-2.6 2.6,2.6, body extent -2.5,-2.5 2.5,2.5, height 4.03
WE-LQS_8040 [mm] "SMD, 2-Leads, Body 8x8mm"
  rrect4% 2.4x7.5 smd: 1(-3.1,0) 2(3.1,0)
  body extent -4,-4 4,4, height 4.2
WE-TPC_4828 [mm] "Wurth Elektronik recommended land pattern"
  rect 0.5x0.5 smd: 1(-2.35,0) 2(2.325,0)
  Top Layer region: 0.75,1.64 1.005,1.504 1.279,1.279 1.504,1.005 1.671,0.692 1.774,0.353 1.809,0 1.774,-0.353 1.671,-0.692 1.504,-1.005 1.279,-1.279 1.005,-1.504 0.75,-1.64 0.75,-2.65 2.75,-2.65 2.75,2.65 0.75,2.65
  Top Layer region: -0.75,1.64 -1.005,1.504 -1.279,1.279 -1.504,1.005 -1.671,0.692 -1.774,0.353 -1.809,0 -1.774,-0.353 -1.671,-0.692 -1.504,-1.005 -1.279,-1.279 -1.005,-1.504 -0.75,-1.64 -0.75,-2.65 -2.75,-2.65 -2.75,2.65 -0.75,2.65
  silkscreen extent -0.5,-2.6 0.5,2.63, body extent -2.5,-2.5 2.5,2.5, height 2
WE-TPC_5828 [mm] "Power Inductor, SMD, 2-Leads, body 5.8x5.8mm"
  rect 6.3x0.9 smd paste-403.566 mask-403.566: 1(0,2.7) 2(0,-2.7)
  Top Layer region: -3.15,0.95 -1.984,0.95 -1.984,0.95 -1.374,1.718 -0.491,2.145 0.49,2.145 1.374,1.718 1.984,0.95 1.984,0.95 3.15,0.95 3.15,0.95 3.15,3.15 -3.15,3.15
  Top Layer region: 3.15,-0.95 1.984,-0.95 1.984,-0.95 1.374,-1.718 0.491,-2.145 -0.49,-2.145 -1.374,-1.718 -1.984,-0.95 -1.984,-0.95 -3.15,-0.95 -3.15,-0.95 -3.15,-3.15 3.15,-3.15
  silkscreen extent -3.05,-0.65 3.05,0.65, body extent -2.9,-2.9 2.9,2.9, height 2.8
WE-TPC_6823 [mm] "Power Inductor, SMD, 2-Leads, body 6.8x6.8mm"
  rect 7.3x0.9 smd paste-403.566 mask-403.566: 1(0,3.2) 2(0,-3.2)
  Top Layer region: 3.65,-1.05 3.65,-3.65 -3.65,-3.65 -3.65,-1.05 -3.65,-1.05 -2.488,-1.05 -1.745,-2.06 -0.627,-2.626 0.627,-2.626 1.745,-2.06 2.488,-1.05 2.488,-1.05 2.488,-1.05
  Top Layer region: -3.65,1.05 -3.65,3.65 3.65,3.65 3.65,1.05 3.65,1.05 2.488,1.05 1.745,2.06 0.627,2.626 -0.627,2.626 -1.745,2.06 -2.488,1.05 -2.488,1.05 -2.488,1.05
  silkscreen extent -3.5,-0.75 3.5,0.75, body extent -3.4,-3.4 3.4,3.4, height 2.3
WEEE_Minimum [mil] "WEEElie bin"
  silkscreen extent -95,-172 99,104
Wurth_632_723_300_011 [mm] "Connector, Receptacle, USB Type C, R/A"
  rect 0.3x1.2 smd: A1(-2.75,10.58) A2(-2.25,10.58) A3(-1.75,10.58) A4(-1.25,10.58) A5(-0.75,10.58) A6(-0.25,10.58) A7(0.25,10.58) A8(0.75,10.58) A9(1.25,10.58) A10(1.75,10.58) A11(2.25,10.58) A12(2.75,10.58)
  round 0.605 hole 0.4: B1(2.8,9.32) B2(2.4,8.62) B3(1.6,8.62) B4(1.2,9.32) B5(0.8,8.62) B6(0.4,9.32) B7(-0.4,9.32) B8(-0.8,8.62) B9(-1.2,9.32) B10(-1.6,8.62) B11(-2.4,8.62) B12(-2.8,9.32) M1(2,9.32) M2(-2,9.32)
  rrect100% 1x1.6 hole 0.6 slot 1.2 at 90 deg: S1(-4.27,8.18) S2(-4.27,3.45) S3(4.27,3.45) S4(4.27,8.18)
  silkscreen extent -4.37,0.15 4.37,10.36, body extent -4.37,-0.96 4.37,10.83, height 3.07
YFF0012AKAD [mm] "TI DSBGA 1.675x1.418mm"
  round 0.23 smd paste-0.13 mask+0.038: A1(-0.4,0.6) A2(0,0.6) A3(0.4,0.6) B1(-0.4,0.2) B2(0,0.2) B3(0.4,0.2) C1(-0.4,-0.2) C2(0,-0.2) C3(0.4,-0.2) D1(-0.4,-0.6) D2(0,-0.6) D3(0.4,-0.6)
  silkscreen extent -0.8,-0.92 0.8,0.92, body extent -0.71,-0.84 0.71,0.84, height 0.63
YKA0004ACAC [mm] "DSBGA, 4-Balls, Body 0.75x0.75mm, Pitch 0.35mm"
  round 0.2 smd paste-0.12 mask+0.032: A1(-0.175,0.175) A2(0.175,0.175) B1(-0.175,-0.175) B2(0.175,-0.175)
  silkscreen extent -0.47,-0.47 0.47,0.48, body extent -0.38,-0.38 0.38,0.38, height 0.45

## Part data
C1 C2 C183: "CAP, CERM, 10 pF, 50 V,+/- 1%, C0G/NP0, 0402", Cap_Case=0402, Manufacturer=MuRata, Supplier Part Number 1=490-6186-1-ND, TempCo=C0G/NP0, Tolerance_%=1, Value2=50V, ValueDisplayed=10pF, AEC Category=Q200, AEC Grade=N/A, AEC Qualified=N, Cap_F=0.00000000001, ComponentLink1Description="Datasheet link", ComponentLink1URL=http://psearch.en.murata.com/capacitor/product/GRM1555C1H100FA01%23.pdf, CompType=Capacitor, LatestRevisionDate=2017-06-22, MountType=SMT, PackageReference=0402, PartNumber=GRM1555C1H100FA01D, Polarized=N, Published=2008-06-19, Publisher="Texas Instruments", RoHS=Y, SizeArea_mm2=0.5, SizeAreaWB_mm2=3, SizeX_mm=1, SizeY_mm=0.5, SizeZ_mm=0.6, Supplier 1=Digi-Key, Supplier 2=Mouser, Supplier Part Number 2=81-GRM1555C1H100FA1D, SymbolVersion=2008-07-09, TaMax_C=125, TaMin_C=-55, Technology=Ceramic, U/M=EA, VDC_V=50
C3 C4 C27 C40 C52 C53 C55 C74 C91 C92 C93 C95 C112 C116 C122 C123 C124 C129 C130 C133 C151 C161 C162 C163 C165 C166 C167 C168 C169 C170 C172 C173 C177 C180 C185 C189 C202 C204 C205 C209 C210 C211 C212 C213 C242 C244: "CAP, CERM, 0.1 µF, 25 V,+/- 10%, X5R, 0402", Cap_Case=0402, Manufacturer=MuRata, Supplier Part Number 1=490-5920-1-ND, TempCo=X5R, Tolerance_%=10, Value2=25V, ValueDisplayed=0.1µF, AEC Category=Q200, AEC Grade=N/A, AEC Qualified=N, Cap_F=0.0000001, ComponentLink1Description="Datasheet link", ComponentLink1URL=http://psearch.murata.com/capacitor/product/GRM155R61E104KA87%23.pdf, CompType=Capacitor, Green_EU RoHS=Passed, Green_EU RoHS-2=Passed, Green_Lifecycle=Active, Green_REACh=Passed, LatestRevisionDate=2017-06-22, MountType=SMT, PackageReference=0402, PartNumber=GRM155R61E104KA87D, Polarized=N, Published=2008-06-19, Publisher="Texas Instruments", RoHS=Y, SizeArea_mm2=0.5, SizeAreaWB_mm2=3, SizeX_mm=1, SizeY_mm=0.5, SizeZ_mm=0.6, Supplier 1=Digi-Key, Supplier 2=Mouser, Supplier Part Number 2=81-GRM155R61E104KA7D, SymbolVersion=2008-07-09, TaMax_C=85, TaMin_C=-55, Technology=Ceramic, U/M=EA, VDC_V=25
C5: "CAP, CERM, 0.47 µF, 16 V,+/- 10%, X5R, 0603", Cap_Case=0603, Manufacturer=MuRata, Supplier Part Number 1=GRM188R61C474KA93D-ND, TempCo=X5R, Tolerance_%=10, Value2=16V, ValueDisplayed=0.47µF, AEC Category=Q200, AEC Qualified=?, Cap_F=0.00000047, ComponentLink1Description="Datasheet link", ComponentLink1URL=http://search.murata.co.jp/Ceramy/PnsearchViewAction.do?HnOFG=ON&HnNFG=ON&SEL_CNT=50&sLang=en&sKey=GRM188R61C474KA93D&x=9&y=9&search=startwith, CompType=Capacitor, Green_EU RoHS=Passed, Green_EU RoHS-2=Incomplete, Green_Lifecycle=Active, Green_REACh=Passed, LatestRevisionDate=2017-06-22, MountType=SMT, PackageReference=0603, PartNumber=GRM188R61C474KA93D, Polarized=N, Published=2008-06-19, Publisher="Texas Instruments", RoHS=Y, SizeArea_mm2=1.28, SizeAreaWB_mm2=4.68, SizeX_mm=1.6, SizeY_mm=0.8, SizeZ_mm=1, Supplier 1=Digi-Key, Supplier 2=Mouser, Supplier 3=Farnell, Supplier Part Number 2=81-GRM188R61C474KA3D, Supplier Part Number 3=1828894, SymbolVersion=2008-07-09, TaMax_C=85, TaMin_C=-55, Technology=Ceramic, U/M=EA, VDC_V=16
C6 C7 C8 C9 C10 C11 C12 C13 C14 C15 C16 C17 C18 C19 C125 C126 C127 C128 C136 C140 C141 C142 C143 C152 C153 C154 C155 C156: "CAP, CERM, 0.1 µF, 16 V,+/- 10%, X6S, 0201", Cap_Case=0201, Manufacturer=TDK, Supplier Part Number 1=445-15903-1-ND, TempCo=X6S, Tolerance_%=10, Value2=16V, ValueDisplayed=0.1µF, AEC Category=Q200, AEC Grade=N/A, AEC Qualified=N, Cap_F=0.0000001, ComponentLink1Description="Datasheet link", ComponentLink1URL=http://product.tdk.com/en/catalog/datasheets/mlcc_commercial_general_en.pdf, CompType=Capacitor, LatestRevisionDate=2017-06-22, MountType=SMT, PackageReference=0201, PartNumber=C0603X6S1C104K030BC, Polarized=N, Published=2008-06-19, Publisher="Texas Instruments", RoHS=Y, SizeArea_mm2=0.18, SizeAreaWB_mm2=2.08, SizeX_mm=0.6, SizeY_mm=0.3, SizeZ_mm=0.33, Supplier 1=Digi-Key, Supplier 2=Newark, Supplier 3=Mouser, Supplier Part Number 2=17X8592, Supplier Part Number 3=810-C0603X6S1C104KBC, SymbolVersion=2008-07-09, TaMax_C=105, TaMin_C=-55, Technology=Ceramic, U/M=EA, VDC_V=16
C20 C21 C145: "CAP, CERM, 22 µF, 6.3 V,+/- 20%, X5R, 0603", Cap_Case=0603, Manufacturer=TDK, Supplier Part Number 1=445-8028-1-ND, TempCo=X5R, Tolerance_%=20, Value2=6.3V, ValueDisplayed=22µF, AEC Category=Q200, AEC Qualified=?, Cap_F=0.000022, ComponentLink1Description="Datasheet link", ComponentLink1URL=http://product.tdk.com/en/catalog/datasheets/mlcc_commercial_general_en.pdf, CompType=Capacitor, Green_EU RoHS=Passed, Green_EU RoHS-2=Passed, Green_Lifecycle=Active, Green_REACh=Passed, LatestRevisionDate=2017-06-22, MountType=SMT, PackageReference=0603, PartNumber=C1608X5R0J226M080AC, Polarized=N, Published=2008-06-19, Publisher="Texas Instruments", RoHS=Y, SizeArea_mm2=1.28, SizeAreaWB_mm2=4.68, SizeX_mm=1.6, SizeY_mm=0.8, SizeZ_mm=1, Supplier 1=Digi-Key, Supplier 2=Newark, Supplier 3=Mouser, Supplier Part Number 2=04X3240, Supplier Part Number 3=810-C1608X5R0J226M, SymbolVersion=2008-07-09, TaMax_C=85, TaMin_C=-55, Technology=Ceramic, U/M=EA, VDC_V=6.3
C22 C23 C117 C118: "CAP, CERM, 47 µF, 10 V,+/- 20%, X5R, 0805", Cap_Case=0805, Manufacturer=MuRata, TempCo=X5R, Tolerance_%=20, Value2=10V, ValueDisplayed=47µF, AEC Category=Q200, AEC Qualified=?, Cap_F=0.000047, ComponentLink1Description="Datasheet link", ComponentLink1URL=http://www.murata.com/~/media/webrenewal/support/library/catalog/products/capacitor/mlcc/c02e.ashx, CompType=Capacitor, Green_EU RoHS=Passed, Green_EU RoHS-2=Incomplete, Green_Lifecycle=Active, Green_REACh=Passed, LatestRevisionDate=2017-06-22, MountType=SMT, PackageReference=0805, PartNumber=GRM21BR61A476ME15, Polarized=N, Published=2008-06-19, Publisher="Texas Instruments", RoHS=Y, SizeArea_mm2=2.5, SizeAreaWB_mm2=6.75, SizeX_mm=2, SizeY_mm=1.25, SizeZ_mm=1.45, SymbolVersion=2008-07-09, TaMax_C=85, TaMin_C=-55, Technology=Ceramic, U/M=EA, VDC_V=10
C24: "CAP, CERM, 0.1 µF, 25 V,+/- 10%, X7R, 0805", Cap_Case=0805, Manufacturer=AVX, Supplier Part Number 1=478-3755-1-ND, TempCo=X7R, Tolerance_%=10, Value1="0.28 ohm", Value2=25V, ValueDisplayed=0.1µF, AEC Category=Q200, AEC Grade=N/A, AEC Qualified=N, Cap_F=0.0000001, ComponentLink1Description="Datasheet link", ComponentLink1URL=http://datasheets.avx.com/X7RDielectric.pdf, CompType=Capacitor, ESR_Ohm=0.28, Green_EU RoHS=Passed, Green_EU RoHS-2=Incomplete, Green_Lifecycle=Active, Green_REACh=Passed, LatestRevisionDate=2017-06-22, MountType=SMT, PackageReference=0805, PartNumber=08053C104KAT2A, Polarized=N, Published=2008-06-19, Publisher="Texas Instruments", RoHS=Y, SizeArea_mm2=2.5, SizeAreaWB_mm2=6.75, SizeX_mm=2, SizeY_mm=1.25, SizeZ_mm=1.45, Supplier 1=Digi-Key, Supplier 2=Newark, Supplier 3=Mouser, Supplier Part Number 2=96M1381, Supplier Part Number 3=581-08053C104K, SymbolVersion=2008-07-09, TaMax_C=125, TaMin_C=-55, Technology=Ceramic, U/M=EA, VDC_V=25
C25 C35: "CAP, CERM, 2.2 µF, 50 V,+/- 10%, X7R, AEC-Q200 Grade 1, 0805", Cap_Case=0805, Manufacturer=TDK, Supplier Part Number 1=445-174216-1-ND, TempCo=X7R, Tolerance_%=10, Value1="0.003288 ohm", Value2=50V, ValueDisplayed=2.2µF, AEC Category=Q200, AEC Grade=1, AEC Qualified=Y, Cap_F=0.0000022, ComponentLink1Description="Datasheet link", ComponentLink1URL=https://product.tdk.com/en/search/capacitor/ceramic/mlcc/info?part_no=CGA4J3X7R1H225K125AB, CompType=Capacitor, ESR_Ohm=0.003288, IRMS_A=3.60029, LatestRevisionDate=2017-06-22, MountType=SMT, PackageReference=0805, PartNumber=CGA4J3X7R1H225K125AB, Polarized=N, Published=2008-06-19, Publisher="Texas Instruments", RoHS=Y, SizeArea_mm2=2.5, SizeAreaWB_mm2=6.75, SizeX_mm=2, SizeY_mm=1.25, SizeZ_mm=1.45, Supplier 1=Digi-Key, Supplier 2=Mouser, Supplier Part Number 2=810-CGA4J3X7R1H225K125AB, SymbolVersion=2008-07-09, TaMax_C=125, TaMin_C=-55, Technology=Ceramic, U/M=EA, VDC_V=50
C26: "CAP, CERM, 4.7 µF, 25 V,+/- 10%, X6S, 0603", Cap_Case=0603, Manufacturer=MuRata, Supplier Part Number 1=490-7199-1-ND, TempCo=X6S, Tolerance_%=10, Value2=25V, ValueDisplayed=4.7µF, AEC Category=Q200, AEC Grade=N/A, AEC Qualified=N, Cap_F=0.0000047, ComponentLink1Description="Datasheet link", ComponentLink1URL=http://search.murata.co.jp/Ceramy/image/img/A01X/G101/ENG/GRM188C81E475KE11-01.pdf, CompType=Capacitor, LatestRevisionDate=2017-06-22, MountType=SMT, PackageReference=0603, PartNumber=GRM188C81E475KE11D, Polarized=N, Published=2008-06-19, Publisher="Texas Instruments", RoHS=Y, SizeArea_mm2=1.28, SizeAreaWB_mm2=4.68, SizeX_mm=1.6, SizeY_mm=0.8, SizeZ_mm=1, Supplier 1=Digi-Key, Supplier 2=Mouser, Supplier Part Number 2=81-GRM188C81E475KE1D, SymbolVersion=2008-07-09, TaMax_C=105, TaMin_C=-55, Technology=Ceramic, U/M=EA, VDC_V=25
C28 C42: "CAP, CERM, 270 pF, 50 V,+/- 5%, C0G/NP0, 0603", Cap_Case=0603, Manufacturer=MuRata, Supplier Part Number 1=490-1437-1-ND, TempCo=C0G/NP0, Tolerance_%=5, Value2=50V, ValueDisplayed=270pF, AEC Category=Q200, AEC Qualified=?, Cap_F=0.00000000027, ComponentLink1Description="Datasheet link", ComponentLink1URL=http://search.murata.co.jp/Ceramy/PnsearchViewAction.do?HnOFG=ON&HnNFG=ON&SEL_CNT=50&sLang=en&sKey=GRM1885C1H271JA01D&x=9&y=9&search=startwith, CompType=Capacitor, Green_EU RoHS=Passed, Green_EU RoHS-2=Incomplete, Green_Lifecycle=Active, Green_REACh=Passed, LatestRevisionDate=2017-06-22, MountType=SMT, PackageReference=0603, PartNumber=GRM1885C1H271JA01D, Polarized=N, Published=2008-06-19, Publisher="Texas Instruments", RoHS=Y, SizeArea_mm2=1.28, SizeAreaWB_mm2=4.68, SizeX_mm=1.6, SizeY_mm=0.8, SizeZ_mm=1, Supplier 1=Digi-Key, Supplier 2=Mouser, Supplier 3=Farnell, Supplier Part Number 2=81-GRM39C271J50, Supplier Part Number 3=1403568, SymbolVersion=2008-07-09, TaMax_C=125, TaMin_C=-55, Technology=Ceramic, U/M=EA, VDC_V=50
C29 C38: library part CMP-0007470-5, "CAP, CERM, 0.1 uF, 100 V, +/- 10%, X7R, 0603", Cap_Case=0603, Manufacturer=MuRata, Supplier Part Number 1=490-6439-1-ND, TempCo=X7R, Tolerance_%=10%, Value1=Unknown, Value2=100V, ValueDisplayed=0.1uF, AEC Category=Q200, AEC Qualified=?, Cap_F=100nF, ComponentLink1Description="Datasheet link", ComponentLink1URL=http://search.murata.co.jp/Ceramy/image/img/A01X/G101/ENG/GRM188R72A104KA35-01.pdf, CompType=Capacitor, LatestRevisionDate=2017-03-09, MountType=SMT, PackageReference=0603, PartNumber=GRM188R72A104KA35J, Polarized=N, Published=2008-06-19, Publisher="Texas Instruments", RoHS=Y, SizeArea_mm2=1.28, SizeAreaWB_mm2=4.68, SizeX_mm=1.6, SizeY_mm=0.8, SizeZ_mm=1, Supplier 1=Digi-Key, Supplier 2=Mouser, Supplier Part Number 2=81-GRM188R72A104KA5J, TaMax_C=125°C, TaMin_C=-55°C, Technology=Ceramic, U/M=EA, VDC_V=100V
C30 C31 C36 C37 C70 C71 C200 C201 C208 C214 C232 C233: library part CMP-0008724-2, "CAP, CERM, 2.2 uF, 100 V, +/- 10%, X7S, 1206", Cap_Case=1206_180, Manufacturer=TDK, Supplier Part Number 1=445-5207-1-ND, TempCo=X7S, Tolerance_%=10%, Value1="0.005718 ohm", Value2=100V, ValueDisplayed=2.2uF, AEC Category=Q200, AEC Grade=N/A, AEC Qualified=N, Cap_F=2.2µF, ComponentLink1Description="Datasheet link", ComponentLink1URL=https://product.tdk.com/en/search/capacitor/ceramic/mlcc/info?part_no=C3216X7S2A225K160AB, CompType=Capacitor, ESR_Ohm=5.718m, IRMS_A=3.03632A, LatestRevisionDate=2017-03-09, MountType=SMT, PackageReference=1206, PartNumber=C3216X7S2A225K160AB, Polarized=N, Published=2008-06-19, Publisher="Texas Instruments", RoHS=Y, SizeArea_mm2=5.12, SizeAreaWB_mm2=10.92, SizeX_mm=3.2, SizeY_mm=1.6, SizeZ_mm=1.8, Supplier 1=Digi-Key, Supplier 2=Mouser, Supplier Part Number 2=810-C3216X7S2A225K160AB, TaMax_C=125°C, TaMin_C=-55°C, Technology=Ceramic, U/M=EA, VDC_V=100V
C32: "CAP, CERM, 2200 pF, 16 V,+/- 10%, X5R, 0402", Cap_Case=0402, Manufacturer=MuRata, Supplier Part Number 1=GRM155R61C222KA01D-ND, TempCo=X5R, Tolerance_%=10, Value2=16V, ValueDisplayed=2200pF, AEC Category=Q200, AEC Qualified=?, Cap_F=0.0000000022, ComponentLink1Description="Datasheet link", ComponentLink1URL=http://search.murata.co.jp/Ceramy/PnsearchViewAction.do?HnOFG=ON&HnNFG=ON&SEL_CNT=50&sLang=en&sKey=GRM155R61C222KA01D&x=9&y=9&search=startwith, CompType=Capacitor, LatestRevisionDate=2017-06-22, MountType=SMT, PackageReference=0402, PartNumber=GRM155R61C222KA01D, Polarized=N, Published=2008-06-19, Publisher="Texas Instruments", RoHS=Y, SizeArea_mm2=0.5, SizeAreaWB_mm2=3, SizeX_mm=1, SizeY_mm=0.5, SizeZ_mm=0.6, Supplier 1=Digi-Key, Supplier 2=Mouser, Supplier Part Number 2=81-GRM155R61C222KA1D, SymbolVersion=2008-07-09, TaMax_C=85, TaMin_C=-55, Technology=Ceramic, U/M=EA, VDC_V=16
C33 C182 C186: "CAP, CERM, 100 pF, 50 V,+/- 5%, C0G/NP0, 0402", Cap_Case=0402, Manufacturer="Wurth Elektronik", Supplier Part Number 1=732-7475-1-ND, TempCo=C0G/NP0, Tolerance_%=5, Value2=50V, ValueDisplayed=100pF, AEC Category=Q200, AEC Grade=N/A, AEC Qualified=N, Cap_F=0.0000000001, ComponentLink1Description="Datasheet link", ComponentLink1URL=http://katalog.we-online.de/pbs/datasheet/885012005061.pdf, CompType=Capacitor, Green_EU RoHS=Incomplete, Green_EU RoHS-2=Incomplete, Green_Lifecycle="Not Set", Green_REACh=Incomplete, LatestRevisionDate=2017-06-22, MountType=SMT, PackageReference=0402, PartNumber=885012005061, Polarized=N, Published=2008-06-19, Publisher="Texas Instruments", RoHS=Y, SizeArea_mm2=0.5, SizeAreaWB_mm2=3, SizeX_mm=1, SizeY_mm=0.5, SizeZ_mm=0.6, Supplier 1=Digi-Key, Supplier 2=Mouser, Supplier Part Number 2=710-885012005061, SymbolVersion=2008-07-09, TaMax_C=125, TaMin_C=-55, Technology=Ceramic, U/M=EA, VDC_V=50
C34: library part CMP-0007237-4, "CAP, CERM, 100 pF, 100 V, +/- 5%, C0G/NP0, 0603", Cap_Case=0603, Manufacturer=MuRata, Supplier Part Number 1=490-1351-1-ND, TempCo=C0G/NP0, Tolerance_%=5%, Value1=Unknown, Value2=100V, ValueDisplayed=100pF, AEC Category=Q200, AEC Qualified=?, Cap_F=100pF, ComponentLink1Description="Datasheet link", ComponentLink1URL=http://search.murata.co.jp/Ceramy/PnsearchViewAction.do?HnOFG=ON&HnNFG=ON&SEL_CNT=50&sLang=en&sKey=GRM1885C2A101JA01D&x=9&y=9&search=startwith, CompType=Capacitor, LatestRevisionDate=2017-03-09, MountType=SMT, PackageReference=0603, PartNumber=GRM1885C2A101JA01D, Polarized=N, Published=2008-06-19, Publisher="Texas Instruments", RoHS=Y, SizeArea_mm2=1.28, SizeAreaWB_mm2=4.68, SizeX_mm=1.6, SizeY_mm=0.8, SizeZ_mm=1, Supplier 1=Digi-Key, Supplier 2=Mouser, Supplier 3=Farnell, Supplier Part Number 2=81-GRM1885C2A101JA01, Supplier Part Number 3=1828919, TaMax_C=125°C, TaMin_C=-55°C, Technology=Ceramic, U/M=EA, VDC_V=100V
C39 C44 C48 C54 C58 C59 C61 C64 C79 C80 C86 C90 C98 C102 C105 C113 C159 C176 C188 C215 C221 C229: "CAP, CERM, 0.1 µF, 50 V,+/- 10%, X7R, 0603", Cap_Case=0603, Manufacturer="Wurth Elektronik", TempCo=X7R, Tolerance_%=10, Value2=50V, ValueDisplayed=0.1µF, AEC Category=Q200, AEC Grade=N/A, AEC Qualified=N, Cap_F=0.0000001, ComponentLink1Description="Datasheet link", ComponentLink1URL=http://katalog.we-online.de/pbs/datasheet/885012206095.pdf, CompType=Capacitor, Green_EU RoHS=Passed, Green_EU RoHS-2=Incomplete, Green_Lifecycle=Active, Green_REACh=Passed, LatestRevisionDate=2017-06-22, MountType=SMT, PackageReference=0603, PartNumber=885012206095, Polarized=N, Published=2008-06-19, Publisher="Texas Instruments", RoHS=Y, SizeArea_mm2=1.28, SizeAreaWB_mm2=4.68, SizeX_mm=1.6, SizeY_mm=0.8, SizeZ_mm=1, SymbolVersion=2008-07-09, TaMax_C=125, TaMin_C=-55, Technology=Ceramic, U/M=EA, VDC_V=50
C41 C43 C56 C57 C62 C63 C81 C82 C103 C104 C157 C158 C196 C197: "CAP, CERM, 47 µF, 6.3 V,+/- 20%, X5R, 0805", Cap_Case=0805, Manufacturer=MuRata, Supplier Part Number 1=490-13249-1-ND, TempCo=X5R, Tolerance_%=20, Value2=6.3V, ValueDisplayed=47µF, AEC Category=Q200, AEC Grade=N/A, AEC Qualified=N, Cap_F=0.000047, ComponentLink1Description="Datasheet link", ComponentLink1URL=http://psearch.en.murata.com/capacitor/product/GRM219R60J476ME44%23.pdf, CompType=Capacitor, Green_EU RoHS=Passed, Green_EU RoHS-2=Incomplete, Green_Lifecycle=Active, Green_REACh=Passed, LatestRevisionDate=2017-06-22, MountType=SMT, PackageReference=0805, PartNumber=GRM219R60J476ME44D, Polarized=N, Published=2008-06-19, Publisher="Texas Instruments", RoHS=Y, SizeArea_mm2=2.5, SizeAreaWB_mm2=6.75, SizeX_mm=2, SizeY_mm=1.25, SizeZ_mm=1.45, Supplier 1=Digi-Key, Supplier 2=Mouser, Supplier Part Number 2=81-GRM219R60J476ME4D, SymbolVersion=2008-07-09, TaMax_C=85, TaMin_C=-55, Technology=Ceramic, U/M=EA, VDC_V=6.3
C45 C50 C66 C75 C87 C94 C106 C114 C160 C216 C225 C230: "CAP, CERM, 2700 pF, 50 V,+/- 10%, X7R, 0402", Cap_Case=0402, Manufacturer=MuRata, Supplier Part Number 1=490-1306-1-ND, TempCo=X7R, Tolerance_%=10, Value2=50V, ValueDisplayed=2700pF, AEC Category=Q200, AEC Qualified=?, Cap_F=0.0000000027, ComponentLink1Description="Datasheet link", ComponentLink1URL=http://search.murata.co.jp/Ceramy/PnsearchViewAction.do?HnOFG=ON&HnNFG=ON&SEL_CNT=50&sLang=en&sKey=GRM155R71H272KA01D&x=9&y=9&search=startwith, CompType=Capacitor, LatestRevisionDate=2017-06-22, MountType=SMT, PackageReference=0402, PartNumber=GRM155R71H272KA01D, Polarized=N, Published=2008-06-19, Publisher="Texas Instruments", RoHS=Y, SizeArea_mm2=0.5, SizeAreaWB_mm2=3, SizeX_mm=1, SizeY_mm=0.5, SizeZ_mm=0.6, Supplier 1=Digi-Key, Supplier 2=Mouser, Supplier Part Number 2=81-GRM155R71H272KA01, SymbolVersion=2008-07-09, TaMax_C=125, TaMin_C=-55, Technology=Ceramic, U/M=EA, VDC_V=50
C46 C47 C67 C68 C88 C89 C96 C97 C110 C111 C134 C137 C171 C217 C218 C219 C220 C227 C228: "CAP, CERM, 47 µF, 6.3 V,+/- 20%, X5R, 0603", Cap_Case=0603, Manufacturer=MuRata, TempCo=X5R, Tolerance_%=20, Value2=6.3V, ValueDisplayed=47µF, AEC Category=Q200, AEC Qualified=?, Cap_F=0.000047, ComponentLink1Description="Datasheet link", ComponentLink1URL=http://psearch.en.murata.com/capacitor/product/GRM188R60J476ME15%23.pdf, CompType=Capacitor, Green_EU RoHS=Passed, Green_EU RoHS-2=Incomplete, Green_Lifecycle=Active, Green_REACh=Passed, LatestRevisionDate=2017-06-22, MountType=SMT, PackageReference=0603, PartNumber=GRM188R60J476ME15D, Polarized=N, Published=2008-06-19, Publisher="Texas Instruments", RoHS=Y, SizeArea_mm2=1.28, SizeAreaWB_mm2=4.68, SizeX_mm=1.6, SizeY_mm=0.8, SizeZ_mm=1, SymbolVersion=2008-07-09, TaMax_C=85, TaMin_C=-55, Technology=Ceramic, U/M=EA, VDC_V=6.3
C49: "CAP, CERM, 2.2 µF, 35 V,+/- 20%, X5R, 0402", Cap_Case=0402, Manufacturer=MuRata, TempCo=X5R, Tolerance_%=20, Value2=35V, ValueDisplayed=2.2µF, AEC Category=Q200, AEC Qualified=?, Cap_F=0.0000022, ComponentLink1Description="Datasheet link", ComponentLink1URL=https://sps06.itg.ti.com/sites/KMS/crossdivteams/altium/docs/ComponentDatasheets/GRM155R6YA225ME11_0402_X5R_2p2uF_35V_CF_special.pdf, CompType=Capacitor, LatestRevisionDate=2017-06-22, MountType=SMT, PackageReference=0402, PartNumber=GRM155R6YA225ME11D, Polarized=N, Published=2008-06-19, Publisher="Texas Instruments", RoHS=Y, SizeArea_mm2=0.5, SizeAreaWB_mm2=3, SizeX_mm=1, SizeY_mm=0.5, SizeZ_mm=0.7, SymbolVersion=2008-07-09, TaMax_C=85, TaMin_C=-55, Technology=Ceramic, U/M=EA, VDC_V=35
C51 C76 C175 C226 C231: "CAP, CERM, 680 pF, 25 V,+/- 5%, C0G/NP0, 0402", Cap_Case=0402, Manufacturer=MuRata, Supplier Part Number 1=GRM1555C1E681JA01D-ND, TempCo=C0G/NP0, Tolerance_%=5, Value2=25V, ValueDisplayed=680pF, AEC Category=Q200, AEC Qualified=?, Cap_F=0.00000000068, ComponentLink1Description="Datasheet link", ComponentLink1URL=http://search.murata.co.jp/Ceramy/PnsearchViewAction.do?HnOFG=ON&HnNFG=ON&SEL_CNT=50&sLang=en&sKey=GRM1555C1E681JA01D&x=9&y=9&search=startwith, CompType=Capacitor, LatestRevisionDate=2017-06-22, MountType=SMT, PackageReference=0402, PartNumber=GRM1555C1E681JA01D, Polarized=N, Published=2008-06-19, Publisher="Texas Instruments", RoHS=Y, SizeArea_mm2=0.5, SizeAreaWB_mm2=3, SizeX_mm=1, SizeY_mm=0.5, SizeZ_mm=0.6, Supplier 1=Digi-Key, Supplier 2=Mouser, Supplier Part Number 2=81-GRM1555C1E681JA1D, SymbolVersion=2008-07-09, TaMax_C=125, TaMin_C=-55, Technology=Ceramic, U/M=EA, VDC_V=25
C60 C65 C69 C237 C238 C239 C240: "CAP, CERM, 100 pF, 16 V,+/- 10%, X7R, 0402", Cap_Case=0402, Manufacturer=AVX, Supplier Part Number 1=478-7887-1-ND, TempCo=X7R, Tolerance_%=10, Value2=16V, ValueDisplayed=100pF, AEC Category=Q200, AEC Grade=N/A, AEC Qualified=N, Cap_F=0.0000000001, ComponentLink1Description="Datasheet link", ComponentLink1URL=http://datasheets.avx.com/X7RDielectric.pdf, CompType=Capacitor, LatestRevisionDate=2017-06-22, MountType=SMT, PackageReference=0402, PartNumber=0402YC101KAT2A, Polarized=N, Published=2008-06-19, Publisher="Texas Instruments", RoHS=Y, SizeArea_mm2=0.5, SizeAreaWB_mm2=3, SizeX_mm=1, SizeY_mm=0.5, SizeZ_mm=0.6, Supplier 1=Digi-Key, Supplier 2=Newark, Supplier 3=Mouser, Supplier Part Number 2=94W2827, Supplier Part Number 3=581-0402YC101K, SymbolVersion=2008-07-09, TaMax_C=125, TaMin_C=-55, Technology=Ceramic, U/M=EA, VDC_V=16
C72 C241: "CAP, CERM, 1 µF, 100 V,+/- 10%, X7S, 0805", Cap_Case=0805, Manufacturer=TDK, Supplier Part Number 1=445-5205-1-ND, TempCo=X7S, Tolerance_%=10, Value1="0.008255 ohm", Value2=100V, ValueDisplayed=1µF, AEC Category=Q200, AEC Grade=N/A, AEC Qualified=N, Cap_F=0.000001, ComponentLink1Description="Datasheet link", ComponentLink1URL=https://product.tdk.com/en/search/capacitor/ceramic/mlcc/info?part_no=C2012X7S2A105K125AB, CompType=Capacitor, ESR_Ohm=0.008255, Green_EU RoHS=Passed, Green_EU RoHS-2=Passed, Green_Lifecycle=Active, Green_REACh=Passed, IRMS_A=2.27442, LatestRevisionDate=2017-06-22, MountType=SMT, PackageReference=0805, PartNumber=C2012X7S2A105K125AB, Polarized=N, Published=2008-06-19, Publisher="Texas Instruments", RoHS=Y, SizeArea_mm2=2.5, SizeAreaWB_mm2=6.75, SizeX_mm=2, SizeY_mm=1.25, SizeZ_mm=1.45, Supplier 1=Digi-Key, Supplier 2=Newark, Supplier 3=Mouser, Supplier Part Number 2=90R8332, Supplier Part Number 3=810-C2012X7S2A105K, SymbolVersion=2008-07-09, TaMax_C=125, TaMin_C=-55, Technology=Ceramic, U/M=EA, VDC_V=100